# Altium PCB Multi_LT_PCB.PcbDoc
Units mm, origin at the board's own origin, x right, y up, seen from the top; angles counter-clockwise.
Board outline 73.89 x 56.54 mm, 2 copper layers (Top Layer, Bottom Layer); 120 components, 62 nets, 304 pads, 1 vias.
Unrouted connection lines stored in the file: 26.
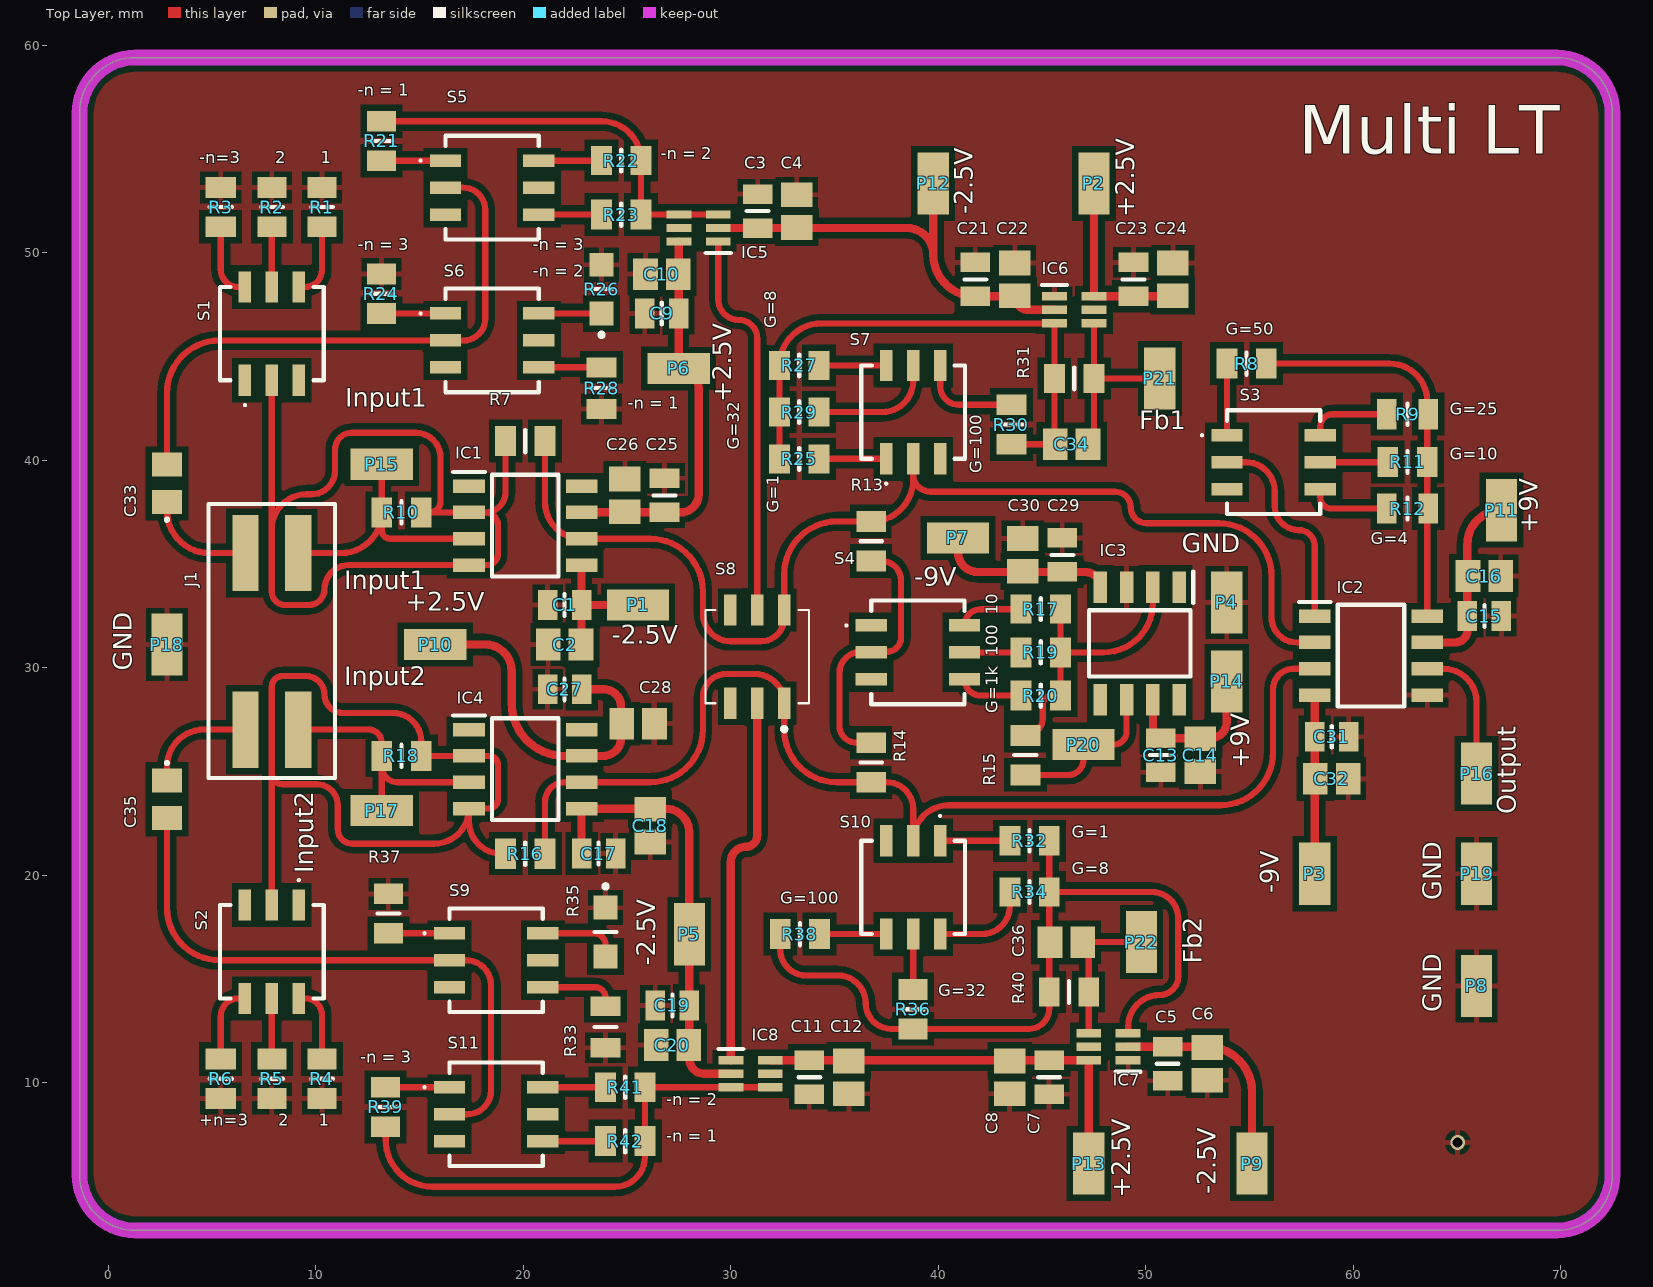
[diagram p0: Top Layer view]
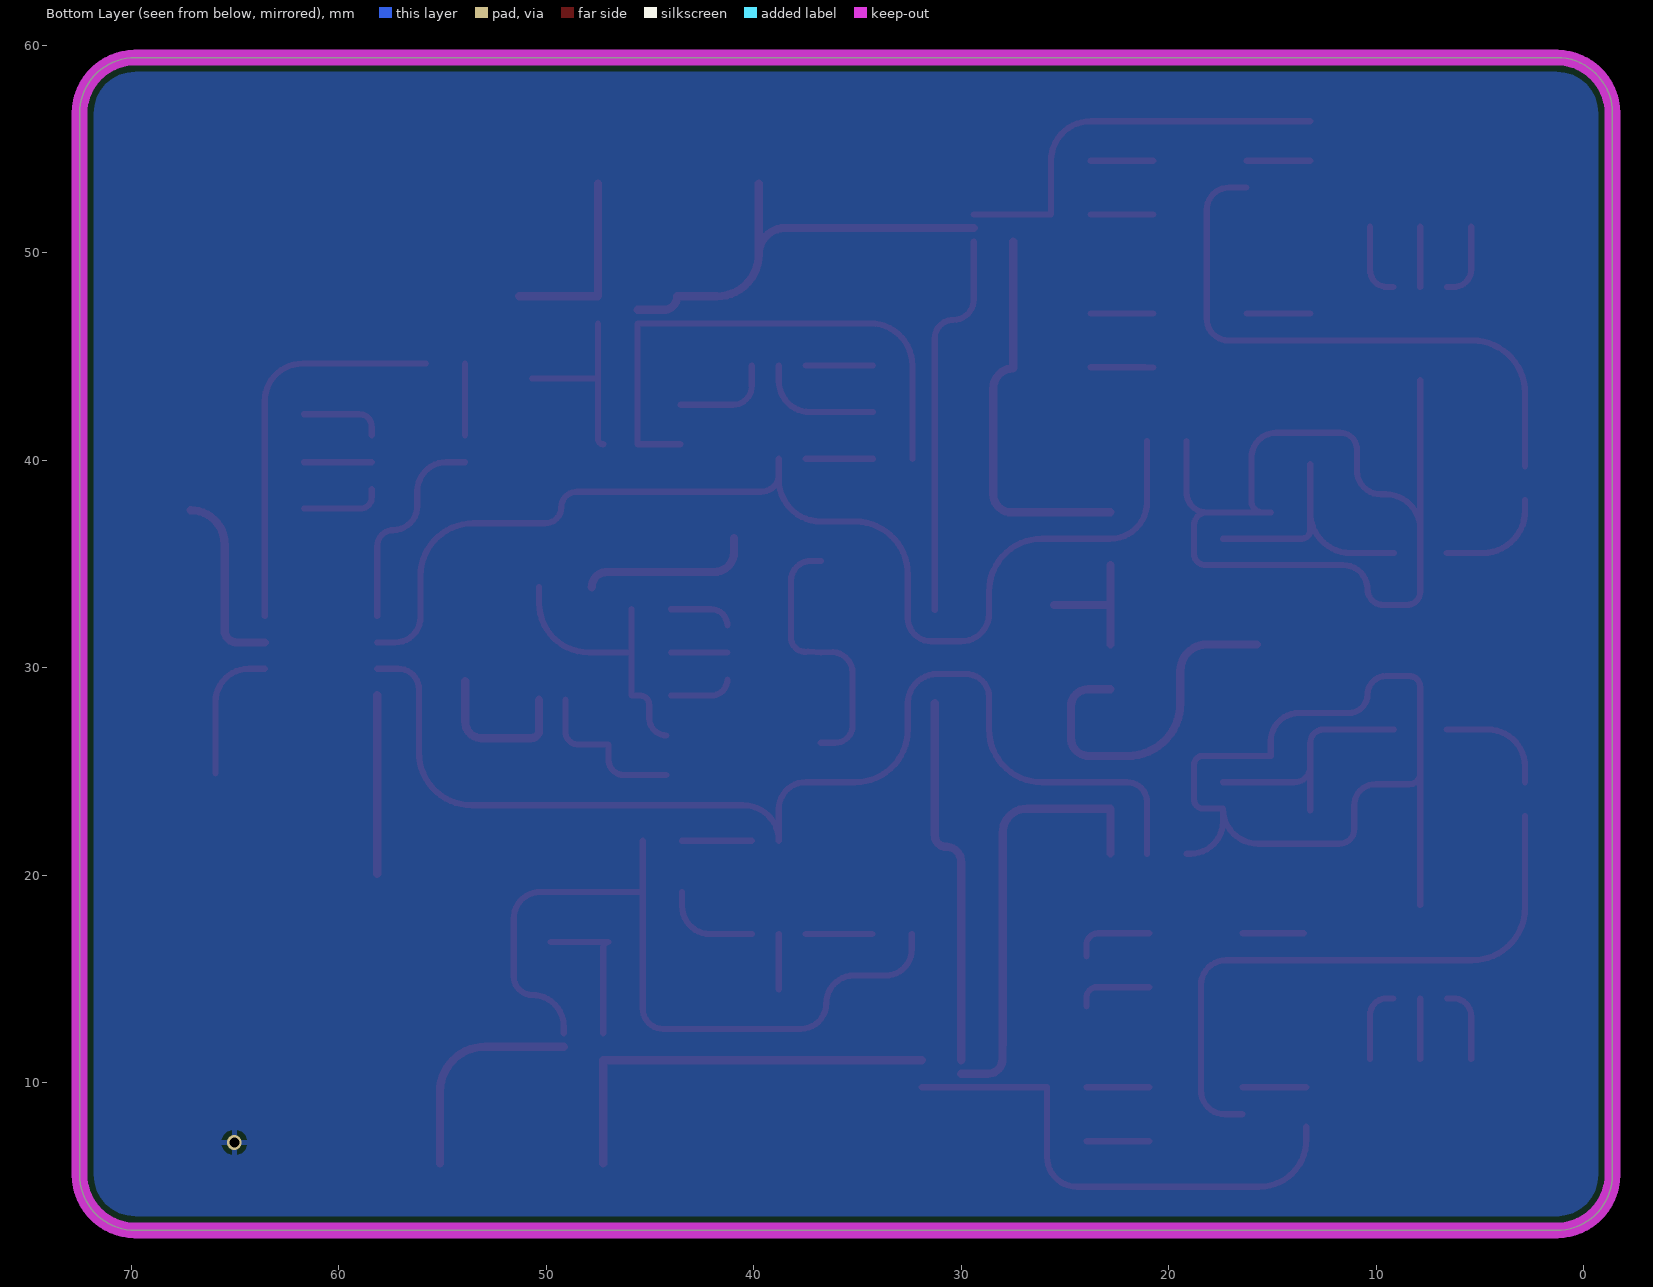
[diagram p1: Bottom Layer view, seen from below]
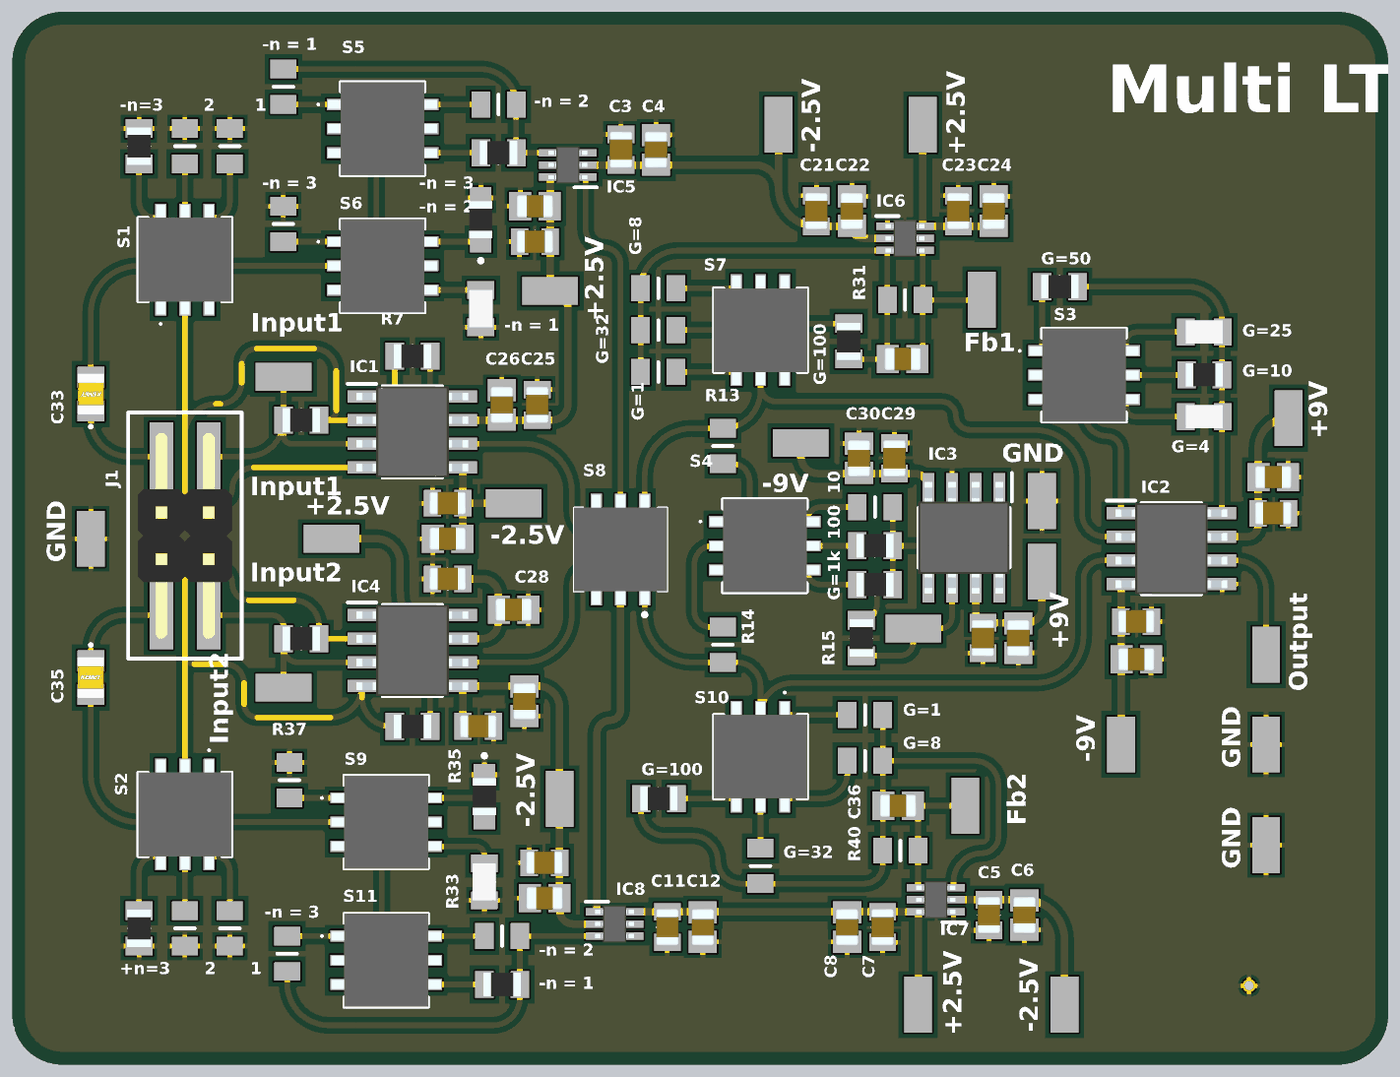
[diagram p2: 3D render of the assembled board from above, using the file's embedded part models]

## Layer stack, top to bottom
Top Solder: solder mask 0.0102, Solder Resist, Dk 3.5
Top Layer: signal copper 0.0356
Dielectric 1: dielectric 0.32, FR-4, Dk 4.8
Bottom Layer: signal copper 0.0356
Bottom Solder: solder mask 0.0102, Solder Resist, Dk 3.5

## Board outline
-1.395,5.563 -1.395,56.718 cw(c1.295,56.716) 1.297,59.407 69.801,59.407 cw(c69.801,56.716) 72.492,56.716 72.492,5.563 cw(c69.801,5.563) 69.801,2.872 1.295,2.872 cw(c1.295,5.563)

## Design rules (kind name [scope] priority, off if disabled: settings)
Clearance [All] p1: gap=0.2 ignorepadtopadclearanceinfootprint=FALSE except(0.3: Arc-Fill Arc-Poly Arc-Region Track-Fill Track-Poly Track-Region SMDPad-Fill SMDPad-Poly SMDPad-Region THPad-Fill THPad-Poly THPad-Region)
PolygonConnect [All] p1: connectstyle=Relief reliefconductorwidth=0.254 reliefentries=4 polygonreliefangle="90 Angle" airgapwidth=0.254
RoutingVias [All] p1: holewidth=0.711 width=1.27 viastyle="Through Hole" minholewidth=0.711 minwidth=1.27 maxholewidth=0.711 maxwidth=1.27
SolderMaskExpansion [All] p1: expansion=0.102 istentingtop=FALSE
Width [All] p1: maxlimit=0.5 minlimit=0.2 preferedwidth=0.3 minimp=50.000000 maximp=50.000000 favimp=50.000000
30 further rules are at their usual default settings.

## Components (designator, comment, footprint, x,y, rotation, side; value= is the part's Value field where it differs from the comment)
C1 "GCM21BD70J106KE02K" CAPC2012X140N 21.983,33.02 r0 top
C2 "GCJ21BR72A104KA01K" CAPC2012X150N 21.983,31.115 r0 top
C3 "GCM21BD70J106KE02K" CAPC2012X140N 31.293,52.007 r270 top
C4 "GCJ21BR72A104KA01K" CAPC2012X150N 33.172,52.007 r270 top
C5 "GCM21BD70J106KE02K" CAPC2012X140N 51.054,10.904 r90 top
C6 "GCJ21BR72A104KA01K" CAPC2012X150N 52.959,10.904 r90 top
C7 "GCM21BD70J106KE02K" CAPC2012X140N 45.339,10.254 r90 top
C8 "GCJ21BR72A104KA01K" CAPC2012X150N 43.434,10.254 r90 top
C9 "GCM21BD70J106KE02K" CAPC2012X140N 26.67,47.071 r0 top
C10 "GCJ21BR72A104KA01K" CAPC2012X150N 26.67,48.971 r0 top
C11 "GCM21BD70J106KE02K" CAPC2012X140N 33.782,10.254 r90 top
C12 "GCJ21BR72A104KA01K" CAPC2012X150N 35.687,10.254 r90 top
C13 "GCM21BD70J106KE02K" CAPC2012X140N 50.724,25.781 r90 top
C14 "GCJ21BR72A104KA01K" CAPC2012X150N 52.629,25.781 r90 top
C15 "GCM21BD70J106KE02K" CAPC2012X140N 66.319,32.487 r180 top
C16 "GCJ21BR72A104KA01K" CAPC2012X150N 66.319,34.417 r180 top
C17 "GCM21BD70J106KE02K" CAPC2012X140N 23.623,21.041 r180 top
C18 "GCJ21BR72A104KA01K" CAPC2012X150N 26.111,22.385 r90 top
C19 "GCM21BD70J106KE02K" CAPC2012X140N 27.178,13.716 r0 top
C20 "GCJ21BR72A104KA01K" CAPC2012X150N 27.185,11.811 r0 top
C21 "GCM21BD70J106KE02K" CAPC2012X140N 41.783,48.714 r270 top
C22 "GCJ21BR72A104KA01K" CAPC2012X150N 43.688,48.714 r270 top
C23 "GCM21BD70J106KE02K" CAPC2012X140N 49.403,48.714 r270 top
C24 "GCJ21BR72A104KA01K" CAPC2012X150N 51.308,48.714 r270 top
C25 "GCM21BD70J106KE02K" CAPC2012X140N 26.797,38.304 r270 top
C26 "GCJ21BR72A104KA01K" CAPC2012X150N 24.892,38.304 r270 top
C27 "GCM21BD70J106KE02K" CAPC2012X140N 21.983,28.956 r0 top
C28 "GCJ21BR72A104KA01K" CAPC2012X150N 25.527,27.305 r180 top
C29 "GCM21BD70J106KE02K" CAPC2012X140N 45.974,35.433 r270 top
C30 "GCJ21BR72A104KA01K" CAPC2012X150N 44.069,35.433 r270 top
C31 "GCM21BD70J106KE02K" CAPC2012X140N 58.962,26.67 r180 top
C32 "GCJ21BR72A104KA01K" CAPC2012X150N 58.962,24.638 r180 top
C33 "C0805C109B3GACTU" C0805 2.819,38.884 r90 top
C34 "GCJ21BR72A104KA01K" CAPC2012X150N 46.42,40.766 r0 top
C35 "C0805C109B3GACTU" C0805 2.819,23.655 r270 top
C36 "GCJ21BR72A104KA01K" CAPC2012X150N 46.169,16.774 r0 top
IC1 "LTC6268IS8-10#PBF" SOIC127P599X175-8N 20.091,36.849 r0 top
IC2 "LT1920IS8#PBF" SOIC127P599X175-8N 60.854,30.582 r0 top
IC3 "OPA810IDR" SOIC127P600X175-8N 49.708,31.166 r270 top
IC4 "LTC6268IS8-10#PBF" SOIC127P599X175-8N 20.091,25.11 r0 top
IC5 "LTC2066HSC6#TRMPBF" SOT65P210X100-6N 28.44,51.187 r180 top
IC6 "LTC2066HSC6#TRMPBF" SOT65P210X100-6N 46.55,47.244 r0 top
IC7 "LTC2066HSC6#TRMPBF" SOT65P210X100-6N 48.199,11.724 r180 top
IC8 "LTC2066HSC6#TRMPBF" SOT65P210X100-6N 30.947,10.424 r0 top
J1 "Jumper" "Jumper 2x2" 7.874,31.269 r180 top
P1 "Pad" Pad 23.927,33.884 r270 top
P2 "Pad" Pad 46.636,51.74 r0 top
P3 "Pad" Pad 59.005,21.666 r180 top
P4 "Pad" Pad 54.762,34.741 r180 top
P5 "Pad" Pad 28.862,18.745 r180 top
P6 "Pad" Pad 25.89,45.288 r270 top
P7 "Pad" Pad 39.345,37.117 r270 top
P8 "Pad" Pad 65.075,13.056 r0 top
P9 "Pad" Pad 54.254,4.496 r0 top
P10 "Pad" Pad 14.148,31.979 r270 top
P11 "Pad" Pad 66.276,35.992 r0 top
P12 "Pad" Pad 40.615,54.94 r180 top
P13 "Pad" Pad 48.113,7.696 r180 top
P14 "Pad" Pad 54.762,30.937 r180 top
P15 "Pad" Pad 11.572,40.665 r270 top
P16 "Pad" Pad 65.075,23.292 r0 top
P17 "Pad" Pad 11.572,23.978 r270 top
P18 "Pad" Pad 1.956,29.515 r0 top
P19 "Pad" Pad 65.075,18.466 r0 top
P20 "Pad" Pad 48.59,25.425 r90 top
P21 "Pad" Pad 51.537,45.542 r180 top
P22 "Pad" Pad 48.92,15.174 r0 top
R1 "CRG0805F20K" RESC2012X65N 10.287,52.197 r270 top
R2 "CRG0805F100K" RESC2012X65N 7.874,52.197 r270 top
R3 "CRGH0805F1M0" RESC2013X65N#1 5.41,52.197 r270 top
R4 "CRG0805F20K" RESC2012X65N 10.287,10.185 r90 top
R5 "CRG0805F100K" RESC2012X65N 7.874,10.185 r90 top
R6 "CRGH0805F1M0" RESC2013X65N#1 5.41,10.185 r90 top
R7 "CRGH0805F1M0" RESC2013X65N#1 20.091,40.919 r0 top
R8 "CRGH0805F1K0" RESC2013X65N#1 54.859,44.653 r0 top
R9 "CRCW08052K05FKEA" RESC2012X50N 62.616,42.215 r0 top
R10 "CRGH0805J10M" RESC2013X65N#2 14.122,37.484 r0 top
R11 "CRCW08055K49FKEAHP" RESC2012X60N 62.616,39.916 r0 top
R12 "CRCW080516K5FKEA" RESC2012X50N 62.616,37.668 r0 top
R13 "CRG0805F100K" RESC2012X65N 36.764,36.093 r90 top
R14 "CRG0805F100K" RESC2012X65N 36.764,25.425 r270 top
R15 "CRGH0805F1M0" RESC2013X65N#1 44.196,25.781 r270 top
R16 "CRGH0805F1M0" RESC2013X65N#1 20.091,21.031 r0 top
R17 "CRG0805F100K" RESC2012X65N 44.933,32.817 r0 top
R18 "CRGH0805J10M" RESC2013X65N#2 14.122,25.745 r0 top
R19 "CRGH0805F10K" RESC2013X65N#1 44.933,30.734 r0 top
R20 "CRGH0805F1K0" RESC2013X65N#1 44.933,28.651 r0 top
R21 "CPF0805B499KE1" RESC2012X65N 13.167,55.387 r90 top
R22 "CPF0805B499KE1" RESC2012X65N 24.714,54.437 r0 top
R23 "CRGH0805F191K" RESC2013X65N#1 24.714,51.837 r0 top
R24 "CPF0805B499KE1" RESC2012X65N 13.157,48.021 r90 top
R25 "CPF0805B1M6E1" RESC2012X65N 33.296,40.066 r180 top
R26 "ERJ-6ENF7682V" ERJ6ENF1000V 23.764,48.246 r90 top
R27 "CPF-A-0805B200KE" RESC2012X65N 33.296,44.566 r180 top
R28 "CRCW080514K7FKEA" RESC2012X50N 23.764,43.471 r270 top
R29 "CPF-A-0805B49K9E1" RESC2012X65N 33.296,42.316 r180 top
R30 "CRGH0805F15K" RESC2013X65N#1 43.522,41.716 r270 top
R31 "CPF0805B1M6E1" RESC2012X65N 46.55,43.942 r0 top
R32 "CPF0805B1M6E1" RESC2012X65N 44.399,21.656 r0 top
R33 "CRCW080514K7FKEA" RESC2012X50N 23.957,12.684 r90 top
R34 "CPF-A-0805B200KE" RESC2012X65N 44.399,19.188 r0 top
R35 "ERJ-6ENF7682V" ERJ6ENF1000V 23.957,17.257 r270 top
R36 "CPF-A-0805B49K9E1" RESC2012X65N 38.786,13.538 r270 top
R37 "CPF0805B499KE1" RESC2012X65N 13.487,18.146 r270 top
R38 "CRGH0805F15K" RESC2013X65N#1 33.325,17.156 r180 top
R39 "CPF0805B499KE1" RESC2012X65N 13.36,8.824 r270 top
R40 "CPF0805B1M6E1" RESC2012X65N 46.299,14.366 r0 top
R41 "CPF0805B499KE1" RESC2012X65N 24.907,9.774 r0 top
R42 "CRGH0805F191K" RESC2013X65N#1 24.907,7.174 r0 top
S1 "CS-4-14NA" CS414NA 7.874,46.101 r180 top
S2 "CS-4-14NA" CS414NA 7.874,16.307 r0 top
S3 "CS-4-14NA" CS414NA 56.159,39.903 r90 top
S4 "CS-4-14NA" CS414NA 39.014,30.734 r90 top
S5 "CS-4-14NA" CS414NA 18.491,53.137 r90 top
S6 "CS-4-14NA" CS414NA 18.491,45.771 r90 top
S7 "CS-4-14NA" CS414NA 38.786,42.316 r180 top
S8 "CS-4-22YTA" CS422YTA 31.267,30.535 r180 top
S9 "CS-4-14NA" CS414NA 18.684,15.896 r90 top
S10 "CS-4-14NA" CS414NA 38.786,19.406 r0 top
S11 "CS-4-14NA" CS414NA 18.684,8.474 r90 top

## Footprints (in the part's own frame and the unit in brackets; to place one, negate y for a bottom-side part, rotate by r counter-clockwise, add the part's x,y. Pads: shape width x height; smd on the part's side, far side on the other; paste and mask are expansions set on the pad)
C0805 [mm]
  rect 1.15x1.45 smd: 1(-0.9,0) 2(0.9,0)
  silkscreen extent -1.8,-0.05 -1.7,0.05, body extent -1.1,-0.73 1.1,0.72, height 0.88
CAPC2012X140N [mm]
  rect 0.94x1.43 smd: 1(-0.82,0) 2(0.82,0)
  silkscreen extent 0,-0.53 0,0.53, body extent -1,-0.63 1,0.63, height 1.4
CAPC2012X150N [mm]
  rect 1.19x1.52 smd: 1(-0.79,0) 2(0.79,0)
  body extent -1,-0.63 1,0.63, height 1.5
CS414NA [mm]
  rect 0.6x1.5 smd: 1(1.3,2.25) 2(1.3,-2.25) 3(0,-2.25) 4(-1.3,-2.25) 5(-1.3,2.25) C1(0,2.25)
  silkscreen extent -2.5,-2.25 2.5,3.5, body extent -2.5,-2.94 2.5,2.94, height 2.7
CS422YTA [mm]
  rect 0.6x1.5 smd: A1(-1.3,2.25) A2(1.3,2.25) B1(1.3,-2.25) B2(-1.3,-2.25) C1(0,2.25) C2(0,-2.25)
  silkscreen extent -2.5,-2.25 2.5,3.6, body extent -2.5,-2.94 2.5,2.94, height 2.7
ERJ6ENF1000V [mm]
  rect 1.15x1.15 smd: 1(-1.175,0) 2(1.175,0)
  silkscreen extent -2.3,-0.53 0,0.53, body extent -1,-0.63 1,0.63, height 0.6
"Jumper 2x2" [mil]
  rect 50x145 smd: 1(-50,-167.5) 2(-50,167.5) 3(50,-167.5) 4(50,167.5)
  silkscreen extent -120,-260 120,260, body extent -100,-217 100,217, height 398
Pad [mm]
  rect 1.5x3 smd: 0(0.864,1.6)
RESC2012X50N [mm]
  rect 0.95x1.45 smd: 1(-1,0) 2(1,0)
  silkscreen extent 0,-0.53 0,0.53, body extent -1,-0.62 1,0.63, height 0.45
RESC2012X60N [mm]
  rect 1x1.45 smd: 1(-0.95,0) 2(0.95,0)
  silkscreen extent 0,-0.53 0,0.53, body extent -1,-0.63 1,0.63, height 0.6
RESC2012X65N [mm]
  rect 1x1.4 smd: 1(-0.95,0) 2(0.95,0)
  silkscreen extent 0,-0.53 0,0.53
RESC2013X65N#1 [mm]
  rect 1x1.45 smd: 1(-0.95,0) 2(0.95,0)
  silkscreen extent 0,-0.54 0,0.54, body extent -1,-0.64 1,0.64, height 0.65
RESC2013X65N#2 [mm]
  rect 1x1.45 smd: 1(-0.95,0)
  rect 1x1.45 smd mask+0.102: 2(0.95,0)
  silkscreen extent 0,-0.54 0,0.54, body extent -1,-0.64 1,0.64, height 0.65
SOIC127P599X175-8N [mm]
  rect 1.526x0.65 smd: 1(-2.712,1.905) 2(-2.712,0.635) 3(-2.712,-0.635) 4(-2.712,-1.905) 5(2.712,-1.905) 6(2.712,-0.635) 7(2.712,0.635) 8(2.712,1.905)
  silkscreen extent -3.48,-2.45 1.6,2.58, body extent -3,-2.45 3,2.45, height 1.75
SOIC127P600X175-8N [mm]
  rect 1.525x0.65 smd: 1(-2.712,1.905) 2(-2.712,0.635) 3(-2.712,-0.635) 4(-2.712,-1.905) 5(2.712,-1.905) 6(2.712,-0.635) 7(2.712,0.635) 8(2.712,1.905)
  silkscreen extent -3.47,-2.45 1.6,2.58, body extent -3,-2.45 3,2.45, height 1.75
SOT65P210X100-6N [mm]
  rect 1.2x0.4 smd: 1(-0.95,0.65) 2(-0.95,0) 3(-0.95,-0.65) 4(0.95,-0.65) 5(0.95,0) 6(0.95,0.65)
  silkscreen extent -1.55,1.2 -0.35,1.2, body extent -1.05,-1 1.05,1, height 1

## Part data
C1 C3 C5 C7 C9 C11 C13 C15 C17 C19 C21 C23 C25 C27 C29 C31: "Capacitor 10uF", Case="0805 (in)", Manufacturer_Name="Murata Electronics", Mouser Part Number=81-GCM21BD70J106KE2K, Datasheet Link=https://www.murata.com/en-global/api/pdfdownloadapi?cate=luCeramicCapacitorsSMD&partno=GCM21BD70J106KE02%23, Height=1.4mm, Manufacturer_Part_Number=GCM21BD70J106KE02K, Mounting Style=SMD/SMT, Mouser Price/Stock=https://www.mouser.co.uk/ProductDetail/Murata-Electronics/GCM21BD70J106KE02K?qs=ufv2HEpFn%252BR%2FX0aJNPDpRg%3D%3D
C2 C4 C6 C8 C10 C12 C14 C16 C18 C20 C22 C24 C26 C28 C30 C32 C34 C36: "Capacitor 0.1uF", Case="0805 (in)", Manufacturer_Name="Murata Electronics", Mouser Part Number=81-GCJ21BR72A104KA01, Arrow Part Number=GCJ21BR72A104KA01K, Arrow Price/Stock=https://www.arrow.com/en/products/gcj21br72a104ka01k/murata-manufacturing?region=europe, Datasheet Link=https://psearch.en.murata.com/capacitor/product/GCJ21BR72A104KA01%23.html, Height=1.5mm, Manufacturer_Part_Number=GCJ21BR72A104KA01K, Mounting Style=SMD/SMT, Mouser Price/Stock=https://www.mouser.co.uk/ProductDetail/Murata-Electronics/GCJ21BR72A104KA01K?qs=yTuLhIm%2Fv1BqgzUieC0jrw%3D%3D
C33 C35: "Capacitor 1pF", Case="0805 (in)", Manufacturer_Name=KEMET, Datasheet Link=https://content.kemet.com/datasheets/KEM_C1003_C0G_SMD.pdf, Height=1.1mm, Manufacturer_Part_Number=C0805C109B3GACTU, Mounting Style=SMD/SMT
IC1 IC4: "Integrated Circuit", Case=SOIC-8, Manufacturer_Name="Analog Devices", Mouser Part Number=584-LTC6268IS8-10PBF, Arrow Part Number=LTC6268IS8-10#PBF, Arrow Price/Stock=https://www.arrow.com/en/products/ltc6268is8-10pbf/analog-devices?region=nac, Datasheet Link=https://datasheet.datasheetarchive.com/originals/distributors/Datasheets_SAMA/eb0bf5824ac521a4901f543e1202dae7.pdf, Height=1.752mm, Manufacturer_Part_Number=LTC6268IS8-10#PBF, Mounting Style=SMD/SMT, Mouser Price/Stock=https://www.mouser.co.uk/ProductDetail/Analog-Devices/LTC6268IS8-10PBF?qs=oahfZPh6IAJW%252BkNj5oLlfA%3D%3D
IC2: "Integrated Circuit", Case=SOIC-8, Manufacturer_Name="Analog Devices", Mouser Part Number=584-LT1920IS8#PBF, Arrow Part Number=LT1920IS8#PBF, Arrow Price/Stock=https://www.arrow.com/en/products/lt1920is8pbf/analog-devices?region=nac, Datasheet Link=https://datasheet.datasheetarchive.com/originals/distributors/SFDatasheet-4/sf-00091026.pdf, Height=1.752mm, Manufacturer_Part_Number=LT1920IS8#PBF, Mounting Style=SMD/SMT, Mouser Price/Stock=https://www.mouser.co.uk/ProductDetail/Analog-Devices/LT1920IS8PBF?qs=ytflclh7QUWOSod6PqfjSg%3D%3D
IC3: "Integrated Circuit", Case=SOIC-8, Manufacturer_Name="Texas Instruments", Mouser Part Number=595-OPA810IDR, Arrow Part Number=OPA810IDR, Arrow Price/Stock=https://www.arrow.com/en/products/opa810idr/texas-instruments?region=nac, Datasheet Link=https://www.ti.com/lit/ds/symlink/opa810.pdf, Height=1.75mm, Manufacturer_Part_Number=OPA810IDR, Mounting Style=SMD/SMT, Mouser Price/Stock=https://www.mouser.co.uk/ProductDetail/Texas-Instruments/OPA810IDR?qs=ToK3%2FczOkx8EaDuN35bMdg%3D%3D
IC5 IC6 IC7 IC8: "Integrated Circuit", Case=SC-70-6, Manufacturer_Name="Analog Devices", Mouser Part Number=584-LTC2066HSC6TRMPB, Arrow Part Number=LTC2066HSC6#TRMPBF, Arrow Price/Stock=https://www.arrow.com/en/products/ltc2066hsc6trmpbf/analog-devices, Datasheet Link=https://www.analog.com/media/en/technical-documentation/data-sheets/LTC2066-2067.pdf, Height=1mm, Manufacturer_Part_Number=LTC2066HSC6#TRMPBF, Mounting Style=SMD/SMT, Mouser Price/Stock=https://www.mouser.co.uk/ProductDetail/Analog-Devices/LTC2066HSC6TRMPBF?qs=W0yvOO0ixfHn5Jrn%2FV4Xwg%3D%3D
R1 R4: "Resistor 20k", Case="0805 (in)", Manufacturer_Name="TE Connectivity", Mouser Part Number=279-CRG0805F20K, Datasheet Link=http://www.te.com/commerce/DocumentDelivery/DDEController?Action=showdoc&DocId=Customer+Drawing%7F1623109%7FBA%7Fpdf%7FEnglish%7FENG_CD_1623109_BA.pdf%7F1623109-1, Height=0.65mm, Manufacturer_Part_Number=CRG0805F20K, Mouser Price/Stock=https://www.mouser.co.uk/ProductDetail/TE-Connectivity-Holsworthy/CRG0805F20K?qs=o1jQnaWw5FTLjD3rzUcvvQ%3D%3D, Parameter 1=SMD/SMT
R2 R5 R13 R14 R17: "Resistor 100k", Case="0805 (in)", Manufacturer_Name="TE Connectivity", Mouser Part Number=279-CRG0805F100K, Arrow Part Number=CRG0805F100K, Arrow Price/Stock=https://www.arrow.com/en/products/crg0805f100k/te-connectivity?region=nac, Datasheet Link=http://www.te.com/commerce/DocumentDelivery/DDEController?Action=showdoc&DocId=Customer+Drawing%7F1623109%7FBA%7Fpdf%7FEnglish%7FENG_CD_1623109_BA.pdf%7F1623109-1, Height=0.65mm, Manufacturer_Part_Number=CRG0805F100K, Mounting Style=SMD/SMT, Mouser Price/Stock=https://www.mouser.co.uk/ProductDetail/TE-Connectivity-Holsworthy/CRG0805F100K?qs=VHcS2MTj4gaSH6styLNYqg%3D%3D
R3 R6 R7 R15 R16: "Resistor 1M", Case="0805 (in)", Manufacturer_Name="TE Connectivity", Mouser Part Number=279-CRGH0805F1M0, Arrow Part Number=CRGH0805F1M0, Arrow Price/Stock=https://www.arrow.com/en/products/crgh0805f1m0/te-connectivity, Datasheet Link=http://docs-europe.electrocomponents.com/webdocs/12d7/0900766b812d7379.pdf, Height=0.65mm, Manufacturer_Part_Number=CRGH0805F1M0, Mounting Style=SMD/SMT, Mouser Price/Stock=https://www.mouser.co.uk/ProductDetail/TE-Connectivity-Holsworthy/CRGH0805F1M0?qs=n4i9pByFsMQTrmSXKnTEpA%3D%3D
R8 R20: "Resistor 1k", Case="0805 (in)", Manufacturer_Name="TE Connectivity", Mouser Part Number=279-CRGH0805F1K0, Arrow Part Number=CRGH0805F1K0, Arrow Price/Stock=https://www.arrow.com/en/products/crgh0805f1k0/te-connectivity?region=nac, Datasheet Link=http://docs-europe.electrocomponents.com/webdocs/12d7/0900766b812d7379.pdf, Height=0.65mm, Manufacturer_Part_Number=CRGH0805F1K0, Mounting Style=SDM/SMT, Mouser Price/Stock=https://www.mouser.co.uk/ProductDetail/TE-Connectivity-Holsworthy/CRGH0805F1K0?qs=n4i9pByFsMSWm5mr6nHHgQ%3D%3D
R9: "Resistor 2.05k", Case="0805 (in)", Manufacturer_Name=Vishay, Mouser Part Number=71-CRCW0805-2.05K-E3, Datasheet Link=http://www.vishay.com/docs/20035/dcrcwe3.pdf, Height=0.5mm, Manufacturer_Part_Number=CRCW08052K05FKEA, Mounting Style=SMD/SMT
R10 R18: "Resistor 10M", Case="0805 (in)", Manufacturer_Name="TE Connectivity", Mouser Part Number=279-CRGH0805J10M, Datasheet Link=http://docs-europe.electrocomponents.com/webdocs/12d7/0900766b812d7379.pdf, Height=0.65mm, Manufacturer_Part_Number=CRGH0805J10M, Mounting Style=SMD/SMT, Mouser Price/Stock=https://www.mouser.co.uk/ProductDetail/TE-Connectivity-Holsworthy/CRGH0805J10M?qs=s1WWODT2SXVlIm5RdQkQ6A%3D%3D
R11: "Resistor 5.49k", Case="0805 (in)", Manufacturer_Name=Vishay, Datasheet Link=https://componentsearchengine.com/Datasheets/1/CRCW08051R00FKEAHP.pdf, Height=0.6mm, Manufacturer_Part_Number=CRCW08055K49FKEAHP, Mounting Style=SMD/SMT
R12: "Resistor 16.5k", Case="0805 (in)", Manufacturer_Name=Vishay, Mouser Part Number=71-CRCW0805-16.5K-E3, Datasheet Link=http://www.vishay.com/docs/20035/dcrcwe3.pdf, Height=0.5mm, Manufacturer_Part_Number=CRCW080516K5FKEA, Mounting Style=SMD/SMT
R19: "Resistor 10k", Case="0805 (in)", Manufacturer_Name="TE Connectivity", Mouser Part Number=279-CRGH0805F10K, Arrow Part Number=CRGH0805F10K, Arrow Price/Stock=https://www.arrow.com/en/products/crgh0805f10k/te-connectivity, Datasheet Link=http://docs-europe.electrocomponents.com/webdocs/12d7/0900766b812d7379.pdf, Height=0.65mm, Manufacturer_Part_Number=CRGH0805F10K, Mounting Style=SMD/SMT, Mouser Price/Stock=https://www.mouser.co.uk/ProductDetail/TE-Connectivity-Holsworthy/CRGH0805F10K?qs=HLeXuo0aL2p58CY%2FK%252BmPjw%3D%3D
R21 R22 R24 R37 R39 R41: "Resistor 499k", Case="0805 (in)", Manufacturer_Name="TE Connectivity", Mouser Part Number=279-CPF0805B499KE1, Arrow Part Number=CPF0805B499KE1, Arrow Price/Stock=https://www.arrow.com/en/products/cpf0805b499ke1/te-connectivity, Datasheet Link=http://docs-europe.electrocomponents.com/webdocs/13d1/0900766b813d116f.pdf, Height=0.65mm, Manufacturer_Part_Number=CPF0805B499KE1, Mounting Style=SMD/SMT, Mouser Price/Stock=https://www.mouser.com/Search/Refine.aspx?Keyword=279-CPF0805B499KE1
R23 R42: "Resistor 191k", Case="0805 (in)", Manufacturer_Name="TE Connectivity", Mouser Part Number=279-CRGH0805F191K, Datasheet Link=http://docs-europe.electrocomponents.com/webdocs/12d7/0900766b812d7379.pdf, Height=0.65mm, Manufacturer_Part_Number=CRGH0805F191K, Mounting Style=SMD/SMT, Mouser Price/Stock=https://www.mouser.co.uk/ProductDetail/TE-Connectivity-Neohm/CRGH0805F191K?qs=8G8kQhBkhGgT%2F02BvhuEeQ%3D%3D
R25 R31 R32 R40: "Resistor 1.6M", Case="0805 (in)", Manufacturer_Name="TE Connectivity", Mouser Part Number=279-CPF0805B1M6E1, Datasheet Link=http://docs-europe.electrocomponents.com/webdocs/13d1/0900766b813d116f.pdf, Height=0.65mm, Manufacturer_Part_Number=CPF0805B1M6E1, Mounting Style=SMD/SMT, Mouser Price/Stock=https://www.mouser.co.uk/ProductDetail/TE-Connectivity-Holsworthy/CPF0805B1M6E1?qs=5Dj%252BCDyFp7gud0VX0vRDmw%3D%3D
R26 R35: "Resistor 76.8k", Case="0805 (in)", Manufacturer_Name=Panasonic, Mouser Part Number=667-ERJ-6ENF7682V, Datasheet Link=https://industrial.panasonic.com/cdbs/www-data/pdf/RDA0000/AOA0000C84.pdf, Height=0.7mm, Manufacturer_Part_Number=ERJ-6ENF7682V, Mounting Style=SMD/SMT, Mouser Price/Stock=https://www.mouser.com/Search/Refine.aspx?Keyword=667-ERJ-6ENF7682V
R27 R34: "Resistor 200k", Case="0805 (in)", Manufacturer_Name="TE Connectivity", Mouser Part Number=279-CPF-A-0805B200KE, Datasheet Link=https://www.mouser.in/datasheet/2/418/5/ENG_DS_1773200_1_A-847523.pdf, Height=0.65mm, Manufacturer_Part_Number=CPF-A-0805B200KE, Mounting Style=SMD/SMT, Mouser Price/Stock=https://www.mouser.co.uk/ProductDetail/TE-Connectivity/CPF-A-0805B200KE?qs=chTDxNqvsympgoiwwdg80g%3D%3D
R28 R33: "Resistor 14.7k", Case="0805 (in)", Manufacturer_Name=Vishay, Mouser Part Number=71-CRCW0805-14.7K-E3, Arrow Part Number=CRCW080514K7FKEA, Arrow Price/Stock=https://www.arrow.com/en/products/crcw080514k7fkea/vishay?region=nac, Datasheet Link=http://www.vishay.com/docs/20035/dcrcwe3.pdf, Height=0.5mm, Manufacturer_Part_Number=CRCW080514K7FKEA, Mounting Style=SMD/SMT, Mouser Price/Stock=https://www.mouser.co.uk/ProductDetail/Vishay-Dale/CRCW080514K7FKEA?qs=bMjB6bAaLENHHnllsz%252BSXA%3D%3D
R29 R36: "Resistor 49.9k", Case="0805 (in)", Manufacturer_Name="TE Connectivity", Mouser Part Number=279-CPF-A0805B49K9E1, Datasheet Link=https://www.te.com/commerce/DocumentDelivery/DDEController?Action=showdoc&DocId=Data+Sheet%7F1773200-1%7FB%7Fpdf%7FEnglish%7FENG_DS_1773200-1_B.pdf%7F6-2176217-4, Height=0.65mm, Manufacturer_Part_Number=CPF-A-0805B49K9E1, Mounting Style=SMD/SMT, Mouser Price/Stock=https://www.mouser.vn/ProductDetail/TE-Connectivity-Holsworthy/CPF-A-0805B49K9E1?qs=sGAEpiMZZMtlubZbdhIBILA%2F3gb4ZcwrSl2lU3bSvkw%3D
R30 R38: "Resistor 15k", Case="0805 (in)", Manufacturer_Name="TE Connectivity", Mouser Part Number=279-CRGH0805F15K, Datasheet Link=http://docs-europe.electrocomponents.com/webdocs/12d7/0900766b812d7379.pdf, Height=0.65mm, Manufacturer_Part_Number=CRGH0805F15K, Mounting Style=SMD/SMT, Mouser Price/Stock=https://www.mouser.co.uk/ProductDetail/TE-Connectivity-Holsworthy/CRGH0805F15K?qs=n4i9pByFsMSabXcbjCkahQ%3D%3D
S1 S2 S3 S4 S5 S6 S7 S9 S10 S11: "Switch", Manufacturer_Name="Nidec Components", Mouser Part Number=229-CS-4-14NA, Datasheet Link=https://www.nidec-components.com/e/catalog/switch/cs-4.pdf, Height=2.6mm, Manufacturer_Part_Number=CS-4-14NA, Mounting Style=SMD/SMT, Mouser Price/Stock=https://www.mouser.co.uk/ProductDetail/Nidec-Components/CS-4-14NA?qs=XeJtXLiO41SJhPXQmbZZMw%3D%3D
S8: "Switch", Manufacturer_Name="Copal Electronics", Mouser Part Number=229-CS-4-22YTA, Datasheet Link=https://www.nidec-copal-electronics.com/e/catalog/switch/cs-4.pdf, Height=2.6mm, Manufacturer_Part_Number=CS-4-22YTA, Mounting Style=SMD/SMT, Mouser Price/Stock=https://www.mouser.co.uk/ProductDetail/Nidec-Components/CS-4-22YTA?qs=XeJtXLiO41RMhjAhvBd3rw%3D%3D

## Via types
v1: diameter 0.7, hole 0.5, Top Layer to Bottom Layer, 1 vias

## Nets (pads, with @x,y where several pads share a name; then routed paths per layer and width w, separated by ;. In a path a pad name is that pad's centre, name@x,y a point inside that pad or via, vN(x,y) a via of type N, cw(c..) or ccw(c..) an arc to the next point about the centre after c; other vN are vias at no path point)
+2.5V: C7.2 C8.2 C9.2 C10.2 C11.2 C12.2 C23.2 C24.2 C25.2 C26.2 C27.2 C28.2 IC1.7 IC4.7 IC5.6 IC6.6 IC7.6 IC8.6 P2.0 P6.0 P10.0 P13.0 | length 65.5
  Top Layer w0.4: P10.0 18.161,31.115 cw(c18.161,29.845) 19.431,29.845 19.431,28.285 ccw(c21.971,28.285) 21.971,25.745 IC4.7 23.84,25.745 ccw(c23.84,26.612) 24.707,26.612 24.707,27.305 24.707,28.125 ccw(c23.876,28.125) 23.876,28.956 C27.2 ; IC1.7 24.892,37.484 C25.2 27.578,37.484 ccw(c27.578,38.354) 28.448,38.354 28.448,43.467 ccw(c27.49,43.467) P6.0 C9.2 27.49,48.971 IC5.6 ; IC8.6 C11.2 35.687,11.074 43.434,11.074 C7.2 IC7.6 P13.0 ; P2.0 IC6.6 C23.2 C24.2@51.308,47.894
+9V: C13.2 C14.2 C15.2 C16.2 IC2.7 IC3.7 P11.0 P14.0 | length 16.6
  Top Layer w0.4: IC3.7 50.343,26.982 ccw(c50.724,26.982) C13.2 52.629,26.601 53.119,26.601 ccw(c53.119,27.381) 53.899,27.381 P14.0 ; IC2.7 64.922,31.217 ccw(c64.922,31.794) 65.499,31.794 C15.2 65.499,34.417 65.499,35.952 cw(c67.139,35.952) P11.0
-2.5V: C1.2 C2.2 C3.2 C4.2 C5.2 C6.2 C17.2 C18.2 C19.2 C20.2 C21.2 C22.2 IC1.5 IC4.5 IC5.2 IC6.2 IC7.2 IC8.2 P1.0 P5.0 P9.0 P12.0 | length 60.4
  Top Layer w0.4: C17.2 IC4.5 26.111,23.205 26.833,23.205 cw(c26.833,22.04) 27.998,22.04 C19.2 27.998,11.811 28.005,11.811 28.005,11.132 ccw(c28.712,11.132) 28.712,10.424 IC8.2 ; C2.2@22.803,31.115 C1.2 ; IC1.5 C1.2 ; P1.0 C1.2 ; IC5.2 C3.2 33.172,51.187 38.49,51.187 cw(c38.49,49.926) 39.751,49.926 ; P12.0 39.751,49.926 ; IC6.2 44.338,47.244 cw(c44.338,47.894) 43.688,47.894 C21.2 cw(c41.783,49.926) 39.751,49.926 ; IC7.2 C5.2 52.959,11.724 cw(c52.959,9.565) 55.118,9.565 P9.0
-9V: C29.2 C30.2 C31.2 C32.2 IC2.4 IC3.4 P3.0 P7.0 | length 17.1
  Top Layer w0.4: P7.0 40.945,35.56 ccw(c41.892,35.56) 41.892,34.613 C29.2 47.068,34.613 cw(c47.068,33.878) IC3.4 ; P3.0 58.142,24.638 C31.2 IC2.4
GND: C1.1 C2.1 C3.1 C4.1 C5.1 C6.1 C7.1 C8.1 C9.1 C10.1 C11.1 C12.1 C13.1 C14.1 C15.1 C16.1 C17.1 C18.1 C19.1 C20.1 C21.1 C22.1 C23.1 C24.1 C25.1 C26.1 C27.1 C28.1 C29.1 C30.1 C31.1 C32.1 IC2.5 IC3.3 IC6.1 IC7.1 P4.0 P8.0 P18.0 P19.0 R1.1 R2.1 R3.1 R4.1 R5.1 R6.1 R24.2 R26.2 R28.2 R33.1 R35.1 R37.1
  other v1: 65.024,7.112
In1: IC5.1 S8.C2 | length 18.8
  Top Layer w0.3: IC5.1 29.39,47.75 ccw(c30.378,47.75) 30.378,46.761 cw(c30.378,45.872) 31.267,45.872 S8.C2
In2: IC8.1 S8.C1 | length 17.9
  Top Layer w0.4: IC8.1 29.997,20.65 cw(c30.709,20.65) 30.709,21.361 ccw(c30.709,21.92) 31.267,21.92 S8.C1
NetC33_2: C33.2 S5.C1 S6.C1 | length 28.7
  Top Layer w0.3: C33.2@2.819,39.704 2.819,43.231 cw(c5.359,43.231) 5.359,45.771 S6.C1 17.12,45.771 ccw(c17.12,46.812) 18.161,46.812 18.161,52.07 ccw(c17.094,52.07) 17.094,53.137 S5.C1
NetC34_1: C34.1 IC6.3 R25.2 R27.2 R29.2 R30.2 R31.1 | length 26.8
  Top Layer w0.3: R25.2 R29.2 R27.2 cw(c34.374,44.566) 34.374,46.594 IC6.3 R31.1 45.6,40.766 R30.2
NetC34_2: C34.2 IC6.4 P21.0 R31.2 | length 9.1
  Top Layer w0.3: C34.2@47.24,40.766 ccw(c47.24,41.026) 47.5,41.026 R31.2 ; IC6.4 R31.2 ; P21.0 R31.2
NetC35_2: C35.2 S9.C1 S11.C1 | length 29.9
  Top Layer w0.3: C35.2@2.819,22.835 2.819,18.436 ccw(c5.359,18.436) 5.359,15.896 S9.C1 17.242,15.896 cw(c17.242,14.697) 18.44,14.697 18.44,9.62 cw(c17.295,9.62) 17.295,8.474 S11.C1
NetC36_1: C36.1 IC7.3 R32.2 R34.2 R36.2 R38.2 R40.1 | length 38.4
  Top Layer w0.3: R38.2 32.375,16.419 ccw(c33.63,16.419) 33.63,15.164 35.154,15.164 cw(c35.154,13.818) 36.5,13.818 ccw(c37.729,13.818) 37.729,12.588 R36.2 44.359,12.588 ccw(c44.359,13.579) 45.349,13.579 R40.1 45.349,16.774 R34.2 ; R32.2 R34.2 ; IC7.3 49.149,12.7 cw(c50.673,12.7) 50.673,14.224 ccw(c50.673,15.113) 51.562,15.113 51.562,17.907 ccw(c50.281,17.907) 50.281,19.188 R34.2
NetC36_2: C36.2 IC7.4 P22.0 R40.2 | length 7.3
  Top Layer w0.3: IC7.4 R40.2 47.249,16.514 ccw(c46.989,16.514) 46.989,16.774 P22.0
NetIC2_1: IC2.1 S3.C1 | length 10.2
  Top Layer w0.3: S3.C1 54.813,39.903 cw(c54.813,38.506) 56.21,38.506 56.21,37.795 ccw(c57.379,37.795) 57.379,36.627 cw(c57.379,35.864) 58.142,35.864 IC2.1
NetIC2_8: IC2.8 R8.2 R9.2 R11.2 R12.2 | length 19.1
  Top Layer w0.3: R8.2 61.747,44.653 cw(c61.747,42.835) 63.566,42.835 63.566,42.215 R11.2 63.566,37.668 IC2.8
NetIC3_2: IC3.2 R15.1 R17.2 R19.2 R20.2 | length 13.8
  Top Layer w0.3: R15.1 ccw(c44.196,27.569) 45.025,27.445 ccw(c44.196,27.569) 45.034,27.569 45.034,28.219 cw(c45.466,28.219) 45.466,28.651 R20.2 R19.2 ; R17.2 R19.2 ; IC3.2 50.343,33.122 cw(c47.955,33.122) 47.955,30.734 R19.2
NetIC3_6: IC3.6 P20.0 R15.2 | length 7.9
  Top Layer w0.3: R15.2 46.269,24.831 ccw(c46.269,25.552) 46.99,25.552 P20.0 48.438,26.289 ccw(c48.438,26.924) 49.073,26.924 IC3.6
NetIC5_3: IC5.3 IC5.4 R21.2 R22.2 R23.2 | length 19.9
  Top Layer w0.3: R21.2 23.764,56.337 cw(c23.764,54.437) R22.2 R23.2 IC5.4 IC5.3
NetIC8_3: IC8.3 IC8.4 R39.2 R41.2 R42.2 | length 24.6
  Top Layer w0.3: R39.2 13.36,7.239 ccw(c15.621,7.239) 15.621,4.978 24.409,4.978 ccw(c24.409,6.426) 25.857,6.426 R42.2 R41.2 IC8.3 IC8.4
NetR1_2: R1.2 S1.4 | length 3.7
  Top Layer w0.3: S1.4 9.474,48.351 ccw(c9.474,49.164) 10.287,49.164 R1.2
NetR2_2: R2.2 S1.3 | length 2.9
  Top Layer w0.3: S1.3 R2.2
NetR3_2: R3.2 S1.2 | length 3.7
  Top Layer w0.3: R3.2 5.41,49.196 ccw(c6.255,49.196) 6.255,48.351 S1.2
NetR4_2: R4.2 S2.2 | length 3.7
  Top Layer w0.3: S2.2 9.5,14.057 cw(c9.5,13.269) 10.287,13.269 R4.2
NetR5_2: R5.2 S2.3 | length 2.9
  Top Layer w0.3: R5.2 S2.3
NetR6_2: R6.2 S2.4 | length 3.7
  Top Layer w0.3: R6.2 5.41,13.198 cw(c6.269,13.198) 6.269,14.057 S2.4
NetR8_1: R8.1 S3.1 | length 3.4
  Top Layer w0.3: S3.1 R8.1
NetR9_1: R9.1 S3.2 | length 4
  Top Layer w0.3: S3.2 58.409,41.624 cw(c59.001,41.624) 59.001,42.215 R9.1@61.666,42.215
NetR11_1: R11.1 S3.3 | length 3.3
  Top Layer w0.3: S3.3 61.666,39.903 R11.1
NetR12_1: R12.1 S3.4 | length 4
  Top Layer w0.3: S3.4 58.409,38.202 ccw(c58.943,38.202) 58.943,37.668 R12.1@61.666,37.668
NetR13_1: R13.1 R14.1 S4.C1 | length 13.2
  Top Layer w0.3: R14.1 36.07,26.375 cw(c36.07,27.215) 35.23,27.215 35.23,29.736 cw(c36.247,29.736) 36.164,30.75 S4.C1 37.364,30.774 ccw(c37.504,31.458) 38.202,31.458 38.202,34.193 ccw(c37.251,34.193) 37.251,35.143 R13.1
NetR17_1: R17.1 S4.2 | length 3.2
  Top Layer w0.3: S4.2 cw(c42.047,32.034) 42.047,32.817 R17.1
NetR19_1: R19.1 S4.3 | length 2.7
  Top Layer w0.3: S4.3 R19.1
NetR20_1: R20.1 S4.4 | length 3.2
  Top Layer w0.3: S4.4 ccw(c42.047,29.434) 42.047,28.651 R20.1
NetR21_1: R21.1 S5.1 | length 3.1
  Top Layer w0.3: R21.1 S5.1
NetR22_1: R22.1 S5.2 | length 3
  Top Layer w0.3: S5.2 R22.1
NetR23_1: R23.1 S5.4 | length 3
  Top Layer w0.3: S5.4 R23.1
NetR24_1: R24.1 S6.1 | length 3.1
  Top Layer w0.3: R24.1 S6.1
NetR25_1: R25.1 S7.1 | length 3.2
  Top Layer w0.3: R25.1 S7.1
NetR26_1: R26.1 S6.2 | length 3
  Top Layer w0.3: S6.2 R26.1
NetR27_1: R27.1 S7.2 | length 3.2
  Top Layer w0.3: R27.1 S7.2
NetR28_1: R28.1 S6.4 | length 3
  Top Layer w0.3: S6.4 21.107,44.471 21.107,44.475 23.764,44.475 R28.1
NetR29_1: R29.1 S7.3 | length 6.1
  Top Layer w0.3: R29.1 37.287,42.316 ccw(c37.287,43.815) 38.786,43.815 S7.3
NetR30_1: R30.1 S7.4 | length 4.9
  Top Layer w0.3: S7.4 40.086,43.582 ccw(c41.001,43.582) 41.001,42.666 R30.1
NetR32_1: R32.1 S10.1 | length 3.4
  Top Layer w0.3: S10.1 R32.1
NetR33_2: R33.2 S9.4 | length 3.7
  Top Layer w0.3: S9.4 23.458,14.596 cw(c23.458,14.097) 23.957,14.097 R33.2
NetR34_1: R34.1 S10.2 | length 4.8
  Top Layer w0.3: S10.2 42.093,17.156 ccw(c42.093,18.511) 43.449,18.511 R34.1
NetR35_2: R35.2 S9.2 | length 3.9
  Top Layer w0.3: S9.2 23.398,17.196 cw(c23.398,16.637) 23.957,16.637 R35.2
NetR36_1: R36.1 S10.3 | length 2.7
  Top Layer w0.3: R36.1 S10.3
NetR37_2: R37.2 S9.1 | length 2.9
  Top Layer w0.3: R37.2 S9.1
NetR38_1: R38.1 S10.4 | length 3.2
  Top Layer w0.3: R38.1 S10.4
NetR39_1: R39.1 S11.1 | length 3.1
  Top Layer w0.3: R39.1 S11.1
NetR41_1: R41.1 S11.2 | length 3
  Top Layer w0.3: S11.2 R41.1
NetR42_1: R42.1 S11.4 | length 3
  Top Layer w0.3: S11.4 R42.1
Vfb1: C33.1 J1.3 | length 5.4
  Top Layer w0.3: C33.1@2.819,38.064 2.819,37.567 ccw(c4.862,37.567) 4.862,35.524 J1.3
Vfb2: C35.1 J1.4 | length 5.6
  Top Layer w0.3: C35.1@2.819,24.475 2.819,25.226 cw(c4.608,25.226) 4.608,27.015 J1.4
Vin1: IC1.3 J1.1 P15.0 R10.1 | length 12.8
  Top Layer w0.3: J1.1 11.212,35.524 ccw(c11.212,37.484) R10.1 ; P15.0 R10.1 ; IC1.3 13.582,36.214 cw(c13.582,36.623) 13.172,36.623 R10.1
Vin2: IC4.3 J1.2 P17.0 R18.1 | length 12.3
  Top Layer w0.3: J1.2 12.538,27.015 cw(c12.538,26.38) 13.172,26.38 R18.1 R18.1@13.172,25.236 ; P17.0 R18.1@13.172,25.236 ; IC4.3 13.934,24.475 cw(c13.934,25.236) R18.1@13.172,25.236
Vin-1: IC1.2 IC1.4 R7.1 R10.2 S1.C1 | length 47.1
  Top Layer w0.3: S1.C1 7.874,36.69 ; R10.2 IC1.2 18.154,37.484 ; R10.2@15.487,37.484 ccw(c15.487,37.998) 16.002,37.998 16.002,40.132 ccw(c14.808,40.132) 14.808,41.326 11.735,41.326 ccw(c11.735,40.513) 10.922,40.513 10.922,39.497 cw(c9.779,39.497) 9.779,38.354 9.538,38.354 ccw(c9.538,36.69) 7.874,36.69 ; R7.1 19.141,38.471 cw(c18.154,38.471) 18.154,37.484 ; 7.874,36.69 7.874,33.655 ccw(c8.509,33.655) 8.509,33.02 9.652,33.02 ccw(c9.652,33.782) 10.414,33.782 cw(c11.576,33.782) 11.576,34.944 IC1.4 18.23,34.944 ccw(c18.23,35.484) 18.771,35.484 18.771,36.867 ccw(c18.154,36.867) 18.154,37.484
Vin-2: IC4.2 IC4.4 R16.1 R18.2 S2.C1 | length 43.9
  Top Layer w0.3: S2.C1 7.874,24.892 ; R16.1 18.935,21.031 cw(c18.935,22.586) 17.379,22.586 IC4.4 ; 7.874,24.892 ccw(c8.382,24.892) 8.382,24.384 10.033,24.384 cw(c10.033,23.368) 11.049,23.368 11.049,22.225 ccw(c11.76,22.225) 11.76,21.514 15.689,21.514 ccw(c15.689,23.205) IC4.4 ; 7.874,24.892 7.874,29.083 cw(c8.382,29.083) 8.382,29.591 9.525,29.591 cw(c9.525,28.702) 10.414,28.702 ccw(c11.303,28.702) 11.303,27.813 13.716,27.813 cw(c13.716,26.457) 15.072,26.457 R18.2 IC4.2 18.35,25.745 cw(c18.35,25.324) 18.771,25.324 18.771,23.647 cw(c18.328,23.647) 18.328,23.205 IC4.4
Vout1: IC1.6 IC2.2 R7.2 R13.2 S7.C1 S8.B2 | length 56.2
  Top Layer w0.3: R7.2 21.041,37.976 ccw(c22.803,37.976) IC1.6 26.111,36.214 cw(c26.111,33.674) 28.651,33.674 28.651,32.614 ccw(c29.997,32.614) 29.997,31.267 31.445,31.267 ccw(c31.445,32.39) 32.567,32.39 S8.B2 32.567,34.503 cw(c35.107,34.503) 35.107,37.043 R13.2 ccw(c36.764,39.065) 38.786,39.065 S7.C1@38.786,39.319 ; S7.C1 S7.C1@38.786,39.319 ; IC2.2 57.277,31.217 cw(c57.277,32.436) 56.058,32.436 56.058,34.417 ccw(c53.518,34.417) 53.518,36.957 50.038,36.957 cw(c50.038,37.719) 49.276,37.719 ccw(c48.514,37.719) 48.514,38.481 39.624,38.481 cw(c39.624,39.319) S7.C1@38.786,39.319
Vout2: IC2.3 IC4.6 R14.2 R16.2 S8.A1 S10.C1 | length 55.6
  Top Layer w0.3: R16.2 21.041,23.531 cw(c21.985,23.531) 21.985,24.475 IC4.6 26.111,24.475 ccw(c26.111,27.015) 28.651,27.015 28.651,28.573 cw(c28.951,28.578) 28.651,28.577 cw(c29.769,28.575) 29.769,29.693 31.159,29.693 cw(c31.159,28.285) S8.A1 32.567,27.015 ccw(c35.107,27.015) 35.107,24.475 R14.2 37.506,24.475 cw(c37.506,23.195) 38.786,23.195 S10.C1 cw(c40.498,21.656) 40.498,23.368 53.594,23.368 ccw(c53.594,25.908) 56.134,25.908 56.134,28.956 cw(c57.125,28.956) 57.125,29.947 IC2.3
Voutput: IC2.6 P16.0 | length 6.7
  Top Layer w0.3: IC2.6 64.338,29.947 cw(c64.338,28.346) 65.938,28.346 P16.0
pads on no net: IC1.1 IC1.8 IC3.1 IC3.5 IC3.8 IC4.1 IC4.8 IC5.5 IC6.5 IC7.5 IC8.5 S1.1 S1.5 S2.1 S2.5 S3.5 S4.1 S4.5 S5.3 S5.5 S6.3 S6.5 S7.5 S8.A2 S8.B1 S9.3 S9.5 S10.5 S11.3 S11.5

## Polygon pours and split planes (outlines as drawn)
GND on Bottom Layer "GND_L02_P001" (solid, pour order 1): 69.952,59.411 cw(c69.952,56.871) 72.492,56.871 72.492,5.41 cw(c69.952,5.41) 69.952,2.87 1.143,2.87 cw(c1.143,5.41) -1.397,5.41 -1.397,56.871 cw(c1.143,56.871) 1.143,59.411 15.469,59.411
GND on Top Layer "GND_L01_P000" (solid, pour order 0): 69.977,59.436 cw(c69.977,56.896) 72.517,56.896 72.517,5.461 cw(c69.977,5.461) 69.977,2.921 1.143,2.921 cw(c1.143,5.461) -1.397,5.461 -1.397,56.896 cw(c1.143,56.896) 1.143,59.436 24.257,59.436

## Keep-outs
Keep-Out Layer:
  lines w0.762: -1.395,56.718 cw(c1.295,56.716) 1.297,59.407 69.801,59.407 cw(c69.801,56.716) 72.492,56.716 72.492,5.563 cw(c69.801,5.563) 69.801,2.872 1.295,2.872 cw(c1.295,5.563) -1.395,5.563 -1.395,56.718 ; -1.395,56.718 -1.395,56.718

## Silkscreen, mask and mechanical layers (free items; w line width, h text height)
Top Overlay:
  text "-n = 1" at 12.019,57.364 h1
  text "-n = 2" at 26.624,54.316 h1
  text "-n=3       2       1" at 4.377,54.11 h1
  text "Multi LT" at 57.379,54.008 h4
  text "-2.5V" at 41.974,51.852 h1.52 r90
  text "+2.5V" at 49.746,51.697 h1.52 r90
  text "-n = 3" at 12.019,49.919 h1
  text "-n = 3" at 20.447,49.919 h1
  text "-n = 2" at 20.447,48.641 h1
  text "G=8" at 32.377,46.355 h1 r90
  text "G=50" at 53.848,45.855 h1
  text "+2.5V" at 30.34,42.799 h1.52 r90
  text "-n = 1" at 25.019,42.291 h1
  text "Input1" at 11.421,42.25 h1.52
  text "G=25" at 64.655,41.987 h1
  text "Fb1" at 49.682,41.186 h1.52
  text "G=32" at 30.599,40.513 h1 r90
  text "G=10" at 64.655,39.828 h1
  text "G=100" at 42.283,39.37 h1 r90
  text "G=1" at 32.504,37.465 h1 r90
  text "+9V" at 69.21,36.489 h1.52 r90
  text "G=4" at 60.845,35.764 h1
  text "GND" at 51.74,35.242 h1.52
  text "-9V" at 38.847,33.623 h1.52
  text "Input1" at 11.37,33.461 h1.52
  text "+2.5V" at 14.326,32.423 h1.52
  text "-2.5V" at 24.268,30.848 h1.52
  text "GND" at 1.435,29.843 h1.52 r90
  text "Input2" at 11.37,28.839 h1.52
  text "G=1k  100  10" at 43.045,27.813 h1 r90
  text "+9V" at 55.303,25.157 h1.52 r90
  text "Output" at 68.139,22.922 h1.52 r90
  text "G=1" at 46.429,21.615 h1
  text "Input2" at 10.176,20.091 h1.52 r90
  text "G=8" at 46.429,19.837 h1
  text "-9V" at 56.731,19.118 h1.52 r90
  text "GND" at 64.544,18.794 h1.52 r90
  text "G=100" at 32.385,18.423 h1
  text "Fb2" at 53.017,15.736 h1.52 r90
  text "-2.5V" at 26.657,15.621 h1.52 r90
  text "G=32" at 40.005,13.978 h1
  text "GND" at 64.544,13.384 h1.52 r90
  text "-n = 3" at 12.146,10.764 h1
  text "-n = 2" at 26.878,8.723 h1
  text "+n=3      2      1" at 4.377,7.735 h1
  text "-n = 1" at 26.878,6.945 h1
  text "-2.5V" at 53.683,4.608 h1.52 r90
  text "+2.5V" at 49.568,4.453 h1.52 r90